# EAGLE board AT42QT1010_Capacitive_Touch_Breakout-Panel-v10 (EAGLE 6.5.0), part 1 of 2
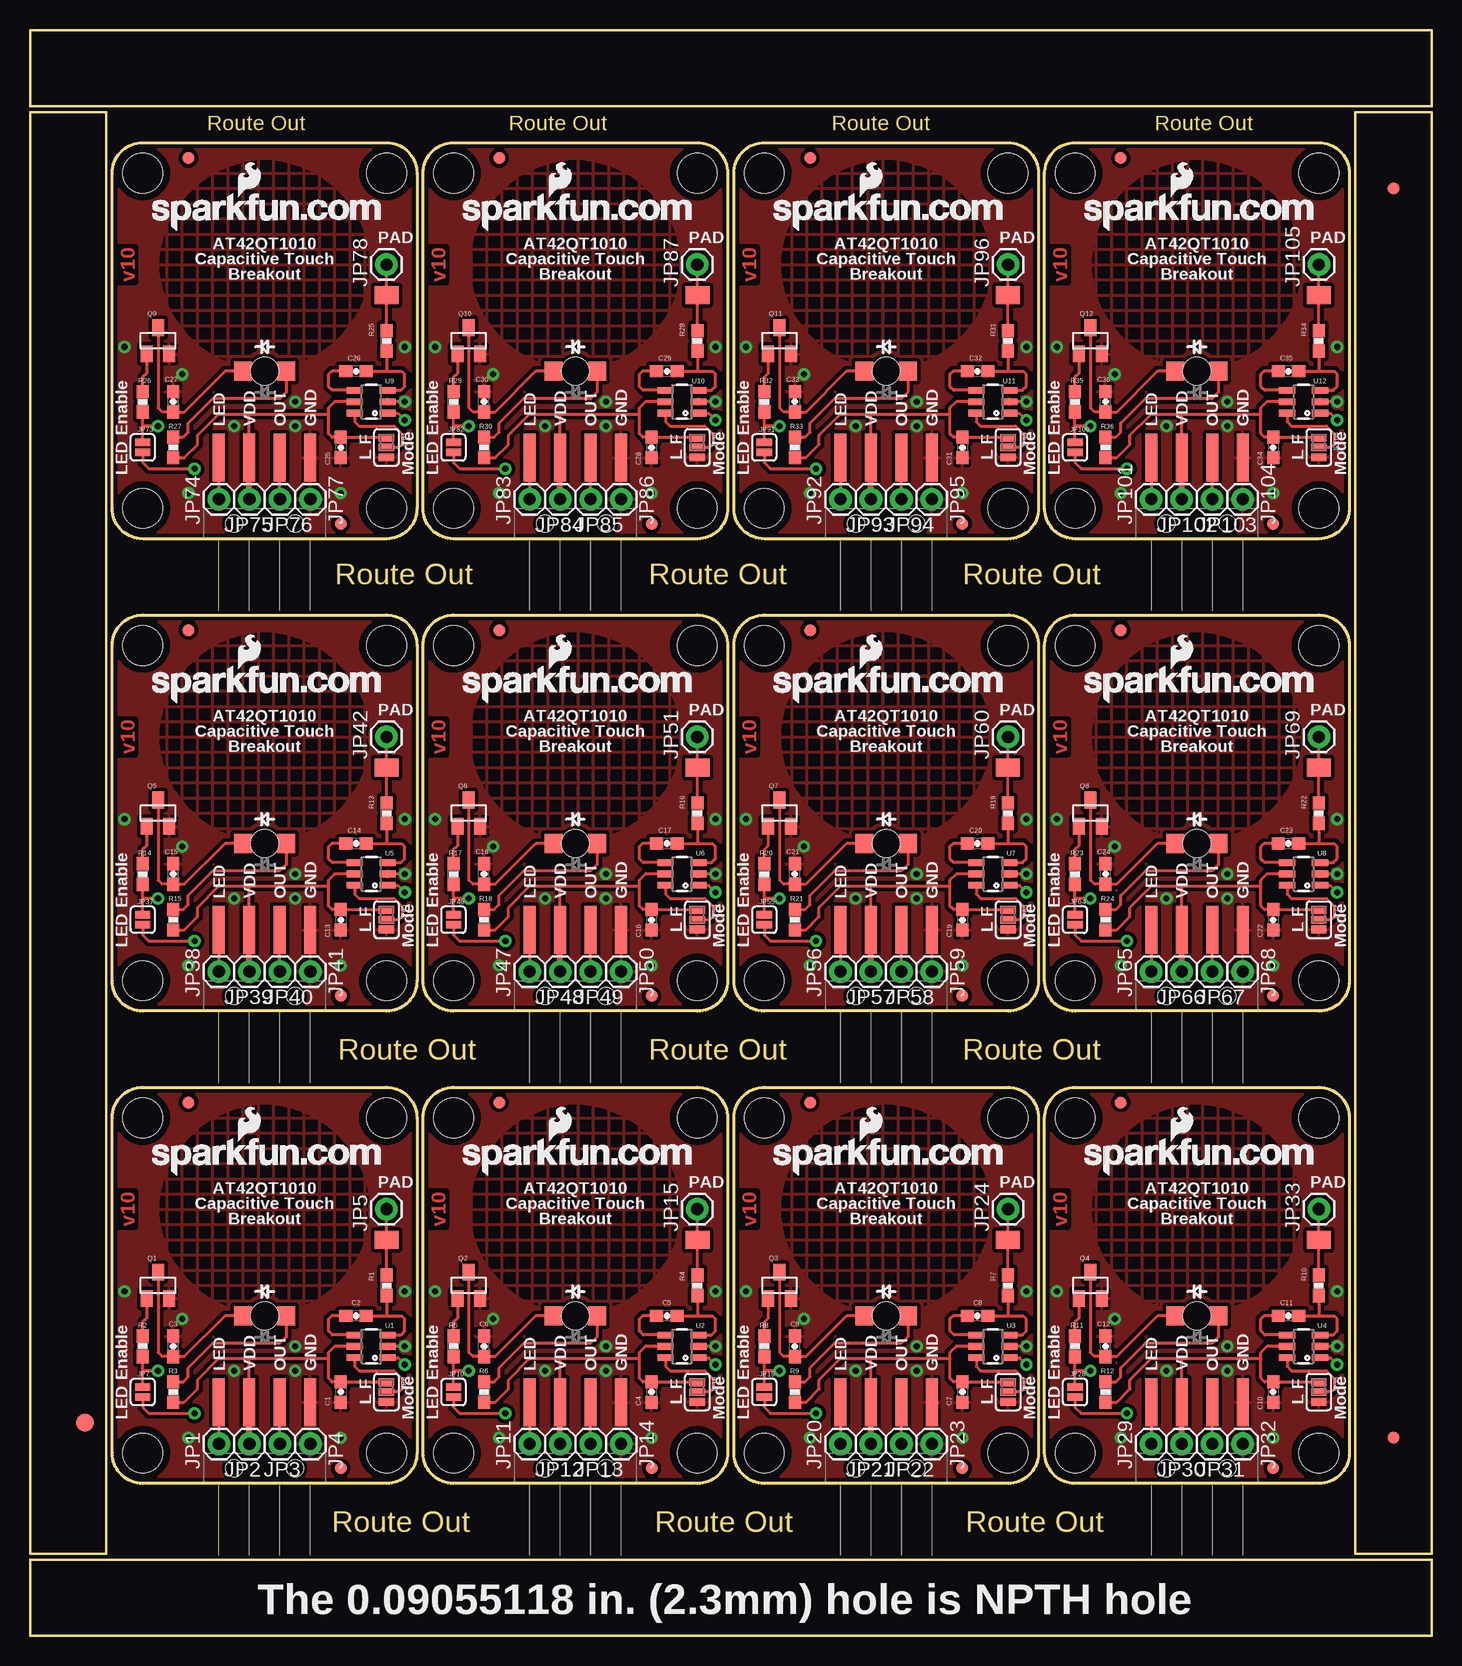
[diagram p0: board, top side]
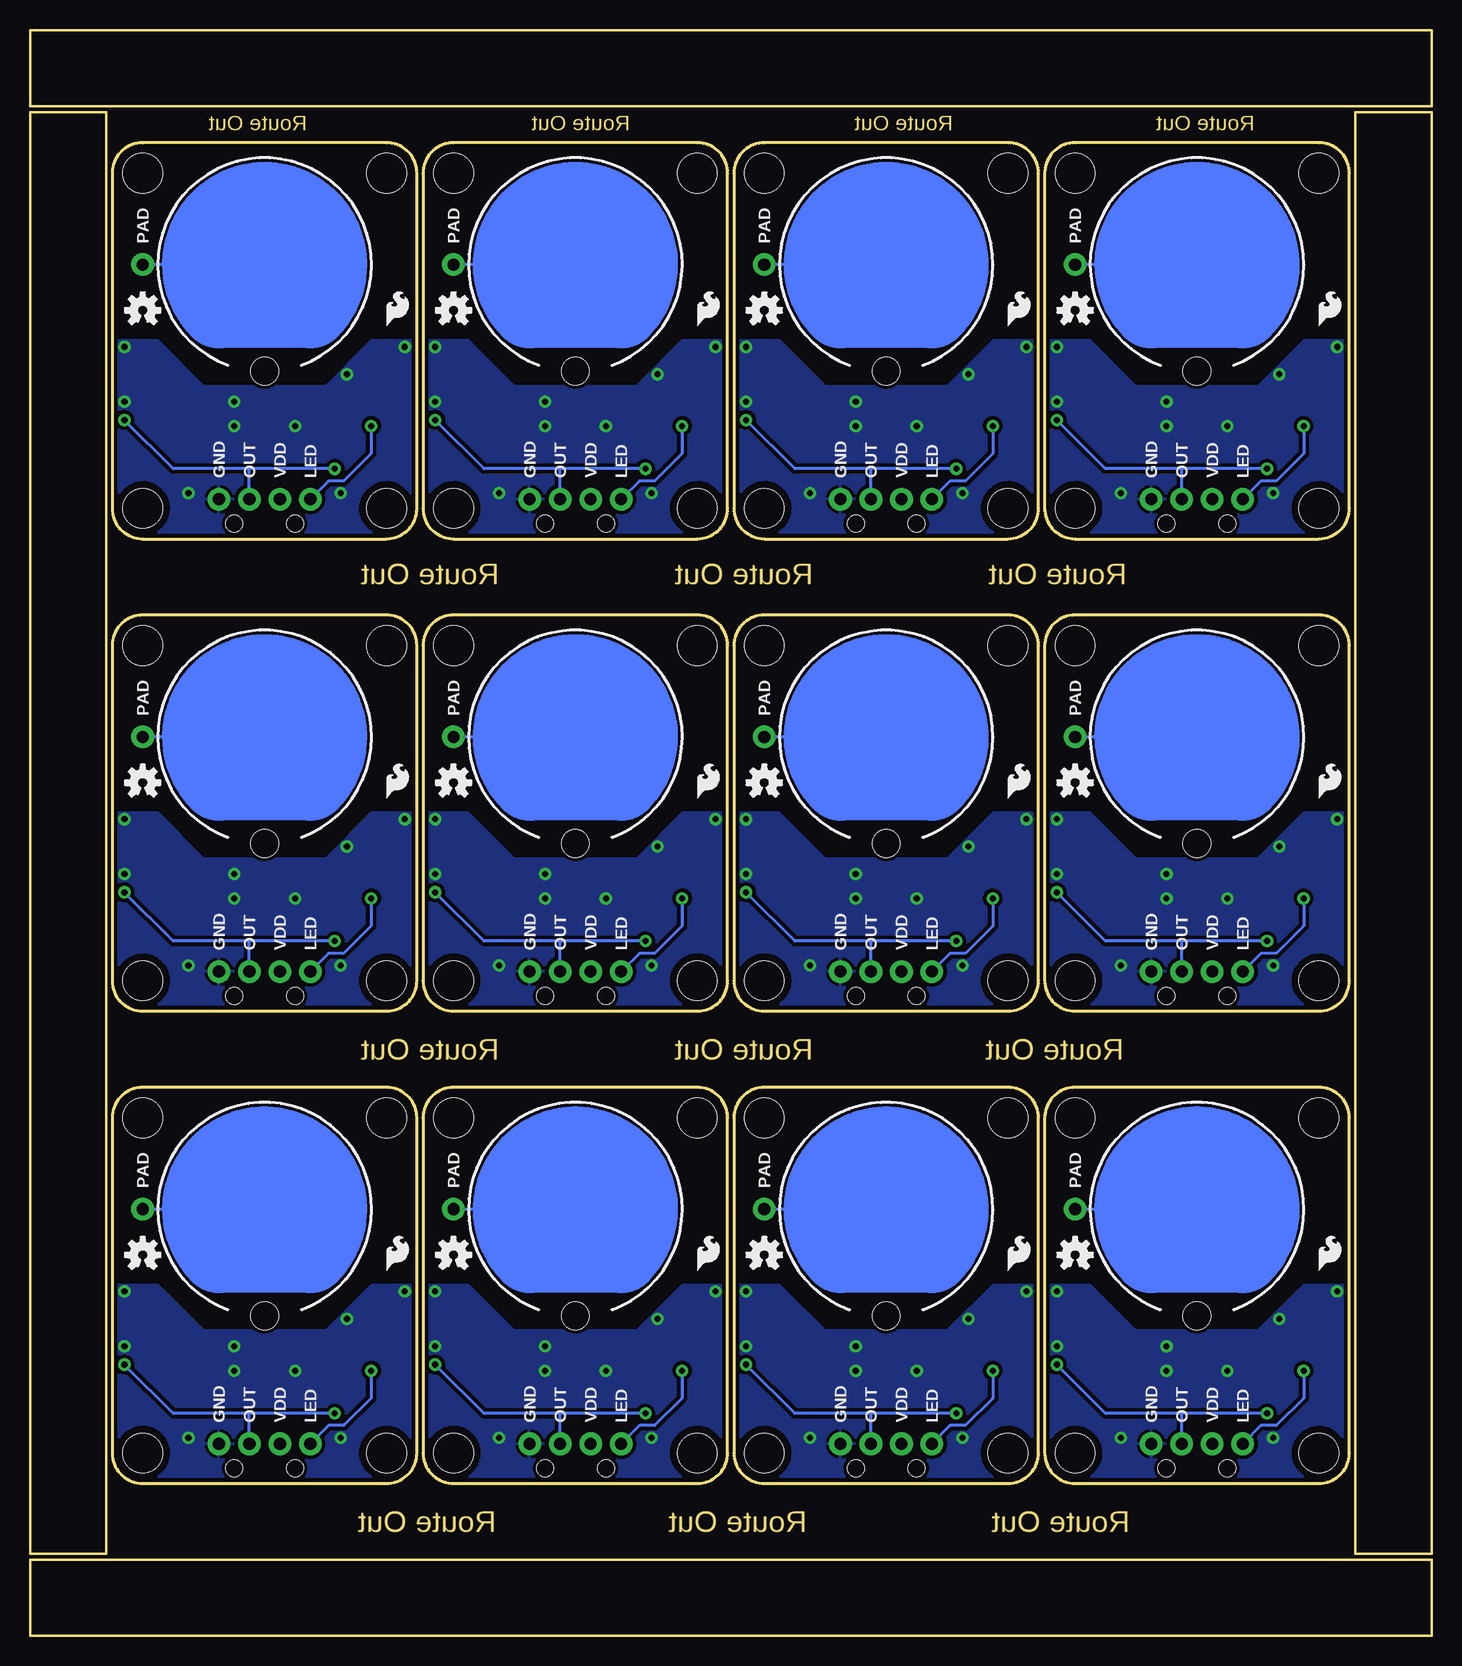
[diagram p1: board, bottom side, seen from below]

Size 116.84 x 133.86 mm. Coordinates in mm from the lower left corner, seen from the top.
Outline: 112 segments
Copper layers (1*16): Top 0.035mm / dielectric 1.5mm / Bottom 0.035mm
Design rules "default": minimum track width 7mil, minimum drill 15mil, track to track 8mil, track to pad 8mil, pad to pad 8mil, via to via 8mil, smd to smd 8mil, copper to edge 8mil, drill to drill 8mil, minimum pad ring 12mil, minimum via ring 10mil, stop-mask expansion 4mil, vias tented up to drill 20mil, thermal gap 10mil
Net classes: 0 default: clearance 0.205 mm
tRestrict: area 6.9,12.7 to 9.4,15.2; area 29.7,12.7 to 32.3,15.2; area 6.9,43.2 to 9.4,45.7; area 29.7,43.2 to 32.3,45.7; area 25.4,25.4 to 26.2,25.9; area 26.9,25.7 to 27.4,25.9; area 27.9,22.4 to 29,25.9; area 29,25.7 to 30.7,26.2; area 9.9,25.9 to 10.2,26.2; area 10.2,22.9 to 10.7,23.1; area 11.7,22.1 to 12.7,22.4; area 10.4,19.1 to 11.2,21.1; 276 more areas

## Footprints (pad centres in the part's own frame; a part is rotated, then mirrored left to right if it is on the bottom)
0603-CAP = smd 1.1 x 1: 1 -0.85,0; 2 0.85,0
FIDUCIAL-1.5X3 = smd 1.5 x 1.5: 1 0,0
FIDUCIAL-1X2 = smd 1 x 1: 1 0,0
1X01 = drill 1.016 pad 1.88: 1 0,0
1X04-SMD_LONG = smd 1 x 4: 1 -3.81,5.5; 2 -1.27,5.5; 3 1.27,5.5; 4 3.81,5.5 | hole 1.4: -2.54,0; 2.54,0
SJ_2S = smd 0.635 x 1.27: 1 -0.412,0; 2 0.412,0
SJ_3_PASTE1&2 = smd 0.635 x 1.27: 1 -0.813,0; 2 0,0; 3 0.813,0
PAD-1.5X4.5 = smd 1.5 x 2: P$1 0,0
LED-1206-BOTTOM = smd 1.5 x 1.6: A -1.8,0; C 1.8,0 | hole 2.3: 0,0
SOT23 = smd 1 x 1.4: 1 -0.95,-1.1; 2 0.95,-1.1; 3 0,1.1
0603-RES = smd 1.1 x 1: 1 -0.85,0; 2 0.85,0
STAND-OFF = hole 3.302: 0,0
SOT23-6 = smd 0.55 x 1.35: 1 -0.95,-1.375; 2 0,-1.375; 3 0.95,-1.375; 4 0.95,1.375; 5 0,1.375; 6 -0.95,1.375

## Placement (x,y rotation side)
C1  0.1uF  [0603-CAP]  25.91,20.32 270 top
C2  10nF  [0603-CAP]  27.18,26.67 180 top
C3  10nF  [0603-CAP]  11.94,24.13 90 top
C4  0.1uF  [0603-CAP]  51.82,20.32 270 top
C5  10nF  [0603-CAP]  53.09,26.67 180 top
C6  10nF  [0603-CAP]  37.85,24.13 90 top
C7  0.1uF  [0603-CAP]  77.72,20.32 270 top
C8  10nF  [0603-CAP]  78.99,26.67 180 top
C9  10nF  [0603-CAP]  63.75,24.13 90 top
C10  0.1uF  [0603-CAP]  103.63,20.32 270 top
C11  10nF  [0603-CAP]  104.9,26.67 180 top
C12  10nF  [0603-CAP]  89.66,24.13 90 top
C13  0.1uF  [0603-CAP]  25.91,59.69 270 top
C14  10nF  [0603-CAP]  27.18,66.04 180 top
C15  10nF  [0603-CAP]  11.94,63.5 90 top
C16  0.1uF  [0603-CAP]  51.82,59.69 270 top
C17  10nF  [0603-CAP]  53.09,66.04 180 top
C18  10nF  [0603-CAP]  37.85,63.5 90 top
C19  0.1uF  [0603-CAP]  77.72,59.69 270 top
C20  10nF  [0603-CAP]  78.99,66.04 180 top
C21  10nF  [0603-CAP]  63.75,63.5 90 top
C22  0.1uF  [0603-CAP]  103.63,59.69 270 top
C23  10nF  [0603-CAP]  104.9,66.04 180 top
C24  10nF  [0603-CAP]  89.66,63.5 90 top
C25  0.1uF  [0603-CAP]  25.91,99.06 270 top
C26  10nF  [0603-CAP]  27.18,105.41 180 top
C27  10nF  [0603-CAP]  11.94,102.87 90 top
C28  0.1uF  [0603-CAP]  51.82,99.06 270 top
C29  10nF  [0603-CAP]  53.09,105.41 180 top
C30  10nF  [0603-CAP]  37.85,102.87 90 top
C31  0.1uF  [0603-CAP]  77.72,99.06 270 top
C32  10nF  [0603-CAP]  78.99,105.41 180 top
C33  10nF  [0603-CAP]  63.75,102.87 90 top
C34  0.1uF  [0603-CAP]  103.63,99.06 270 top
C35  10nF  [0603-CAP]  104.9,105.41 180 top
C36  10nF  [0603-CAP]  89.66,102.87 90 top
E$1  [FIDUCIAL-1.5X3]  4.57,17.78 0 top
E$4  [FIDUCIAL-1X2]  113.67,16.51 0 top
E$5  [FIDUCIAL-1X2]  113.67,120.65 180 top
FID1  FIDUCIAL1X2  [FIDUCIAL-1X2]  13.21,44.45 0 top
FID2  FIDUCIAL1X2  [FIDUCIAL-1X2]  25.91,13.97 0 top
FID3  FIDUCIAL1X2  [FIDUCIAL-1X2]  39.12,44.45 0 top
FID4  FIDUCIAL1X2  [FIDUCIAL-1X2]  51.82,13.97 0 top
FID5  FIDUCIAL1X2  [FIDUCIAL-1X2]  65.02,44.45 0 top
FID6  FIDUCIAL1X2  [FIDUCIAL-1X2]  77.72,13.97 0 top
FID7  FIDUCIAL1X2  [FIDUCIAL-1X2]  90.93,44.45 0 top
FID8  FIDUCIAL1X2  [FIDUCIAL-1X2]  103.63,13.97 0 top
FID9  FIDUCIAL1X2  [FIDUCIAL-1X2]  13.21,83.82 0 top
FID10  FIDUCIAL1X2  [FIDUCIAL-1X2]  25.91,53.34 0 top
FID11  FIDUCIAL1X2  [FIDUCIAL-1X2]  39.12,83.82 0 top
FID12  FIDUCIAL1X2  [FIDUCIAL-1X2]  51.82,53.34 0 top
FID13  FIDUCIAL1X2  [FIDUCIAL-1X2]  65.02,83.82 0 top
FID14  FIDUCIAL1X2  [FIDUCIAL-1X2]  77.72,53.34 0 top
FID15  FIDUCIAL1X2  [FIDUCIAL-1X2]  90.93,83.82 0 top
FID16  FIDUCIAL1X2  [FIDUCIAL-1X2]  103.63,53.34 0 top
FID17  FIDUCIAL1X2  [FIDUCIAL-1X2]  13.21,123.19 0 top
FID18  FIDUCIAL1X2  [FIDUCIAL-1X2]  25.91,92.71 0 top
FID19  FIDUCIAL1X2  [FIDUCIAL-1X2]  39.12,123.19 0 top
FID20  FIDUCIAL1X2  [FIDUCIAL-1X2]  51.82,92.71 0 top
FID21  FIDUCIAL1X2  [FIDUCIAL-1X2]  65.02,123.19 0 top
FID22  FIDUCIAL1X2  [FIDUCIAL-1X2]  77.72,92.71 0 top
FID23  FIDUCIAL1X2  [FIDUCIAL-1X2]  90.93,123.19 0 top
FID24  FIDUCIAL1X2  [FIDUCIAL-1X2]  103.63,92.71 0 top
JP1  M01PTH  [1X01]  15.75,16 0 top
JP2  M01PTH  [1X01]  18.29,16 0 top
JP3  M01PTH  [1X01]  20.83,16 0 top
JP4  M01PTH  [1X01]  23.37,16 0 top
JP5  M01PTH  [1X01]  29.72,35.56 0 top
JP6  SMD  [1X04-SMD_LONG]  19.56,13.97 0 top
JP7  NC  [SJ_2S]  9.4,20.32 90 top
JP8  JUMPER-31-2  [SJ_3_PASTE1&2]  29.72,20.32 270 top
JP9  M01SMD-4.5X1.5  [PAD-1.5X4.5]  29.72,33.02 90 top
JP10  NC  [SJ_2S]  35.31,20.32 90 top
JP11  M01PTH  [1X01]  41.66,16 0 top
JP12  M01PTH  [1X01]  44.2,16 0 top
JP13  M01PTH  [1X01]  46.74,16 0 top
JP14  M01PTH  [1X01]  49.28,16 0 top
JP15  M01PTH  [1X01]  55.63,35.56 0 top
JP16  SMD  [1X04-SMD_LONG]  45.47,13.97 0 top
JP17  M01SMD-4.5X1.5  [PAD-1.5X4.5]  55.63,33.02 90 top
JP18  JUMPER-31-2  [SJ_3_PASTE1&2]  55.63,20.32 270 top
JP19  NC  [SJ_2S]  61.21,20.32 90 top
JP20  M01PTH  [1X01]  67.56,16 0 top
JP21  M01PTH  [1X01]  70.1,16 0 top
JP22  M01PTH  [1X01]  72.64,16 0 top
JP23  M01PTH  [1X01]  75.18,16 0 top
JP24  M01PTH  [1X01]  81.53,35.56 0 top
JP25  SMD  [1X04-SMD_LONG]  71.37,13.97 0 top
JP26  M01SMD-4.5X1.5  [PAD-1.5X4.5]  81.53,33.02 90 top
JP27  JUMPER-31-2  [SJ_3_PASTE1&2]  81.53,20.32 270 top
JP28  NC  [SJ_2S]  87.12,20.32 90 top
JP29  M01PTH  [1X01]  93.47,16 0 top
JP30  M01PTH  [1X01]  96.01,16 0 top
JP31  M01PTH  [1X01]  98.55,16 0 top
JP32  M01PTH  [1X01]  101.09,16 0 top
JP33  M01PTH  [1X01]  107.44,35.56 0 top
JP34  SMD  [1X04-SMD_LONG]  97.28,13.97 0 top
JP35  M01SMD-4.5X1.5  [PAD-1.5X4.5]  107.44,33.02 90 top
JP36  JUMPER-31-2  [SJ_3_PASTE1&2]  107.44,20.32 270 top
JP37  NC  [SJ_2S]  9.4,59.69 90 top
JP38  M01PTH  [1X01]  15.75,55.37 0 top
JP39  M01PTH  [1X01]  18.29,55.37 0 top
JP40  M01PTH  [1X01]  20.83,55.37 0 top
JP41  M01PTH  [1X01]  23.37,55.37 0 top
JP42  M01PTH  [1X01]  29.72,74.93 0 top
JP43  SMD  [1X04-SMD_LONG]  19.56,53.34 0 top
JP44  M01SMD-4.5X1.5  [PAD-1.5X4.5]  29.72,72.39 90 top
JP45  JUMPER-31-2  [SJ_3_PASTE1&2]  29.72,59.69 270 top
JP46  NC  [SJ_2S]  35.31,59.69 90 top
JP47  M01PTH  [1X01]  41.66,55.37 0 top
JP48  M01PTH  [1X01]  44.2,55.37 0 top
JP49  M01PTH  [1X01]  46.74,55.37 0 top
JP50  M01PTH  [1X01]  49.28,55.37 0 top
JP51  M01PTH  [1X01]  55.63,74.93 0 top
JP52  SMD  [1X04-SMD_LONG]  45.47,53.34 0 top
JP53  M01SMD-4.5X1.5  [PAD-1.5X4.5]  55.63,72.39 90 top
JP54  JUMPER-31-2  [SJ_3_PASTE1&2]  55.63,59.69 270 top
JP55  NC  [SJ_2S]  61.21,59.69 90 top
JP56  M01PTH  [1X01]  67.56,55.37 0 top
JP57  M01PTH  [1X01]  70.1,55.37 0 top
JP58  M01PTH  [1X01]  72.64,55.37 0 top
JP59  M01PTH  [1X01]  75.18,55.37 0 top
JP60  M01PTH  [1X01]  81.53,74.93 0 top
JP61  SMD  [1X04-SMD_LONG]  71.37,53.34 0 top
JP62  M01SMD-4.5X1.5  [PAD-1.5X4.5]  81.53,72.39 90 top
JP63  JUMPER-31-2  [SJ_3_PASTE1&2]  81.53,59.69 270 top
JP64  NC  [SJ_2S]  87.12,59.69 90 top
JP65  M01PTH  [1X01]  93.47,55.37 0 top
JP66  M01PTH  [1X01]  96.01,55.37 0 top
JP67  M01PTH  [1X01]  98.55,55.37 0 top
JP68  M01PTH  [1X01]  101.09,55.37 0 top
JP69  M01PTH  [1X01]  107.44,74.93 0 top
JP70  SMD  [1X04-SMD_LONG]  97.28,53.34 0 top
JP71  M01SMD-4.5X1.5  [PAD-1.5X4.5]  107.44,72.39 90 top
JP72  JUMPER-31-2  [SJ_3_PASTE1&2]  107.44,59.69 270 top
JP73  NC  [SJ_2S]  9.4,99.06 90 top
JP74  M01PTH  [1X01]  15.75,94.74 0 top
JP75  M01PTH  [1X01]  18.29,94.74 0 top
JP76  M01PTH  [1X01]  20.83,94.74 0 top
JP77  M01PTH  [1X01]  23.37,94.74 0 top
JP78  M01PTH  [1X01]  29.72,114.3 0 top
JP79  SMD  [1X04-SMD_LONG]  19.56,92.71 0 top
JP80  M01SMD-4.5X1.5  [PAD-1.5X4.5]  29.72,111.76 90 top
JP81  JUMPER-31-2  [SJ_3_PASTE1&2]  29.72,99.06 270 top
JP82  NC  [SJ_2S]  35.31,99.06 90 top
JP83  M01PTH  [1X01]  41.66,94.74 0 top
JP84  M01PTH  [1X01]  44.2,94.74 0 top
JP85  M01PTH  [1X01]  46.74,94.74 0 top
JP86  M01PTH  [1X01]  49.28,94.74 0 top
JP87  M01PTH  [1X01]  55.63,114.3 0 top
JP88  SMD  [1X04-SMD_LONG]  45.47,92.71 0 top
JP89  M01SMD-4.5X1.5  [PAD-1.5X4.5]  55.63,111.76 90 top
JP90  JUMPER-31-2  [SJ_3_PASTE1&2]  55.63,99.06 270 top
JP91  NC  [SJ_2S]  61.21,99.06 90 top
JP92  M01PTH  [1X01]  67.56,94.74 0 top
JP93  M01PTH  [1X01]  70.1,94.74 0 top
JP94  M01PTH  [1X01]  72.64,94.74 0 top
JP95  M01PTH  [1X01]  75.18,94.74 0 top
JP96  M01PTH  [1X01]  81.53,114.3 0 top
JP97  SMD  [1X04-SMD_LONG]  71.37,92.71 0 top
JP98  M01SMD-4.5X1.5  [PAD-1.5X4.5]  81.53,111.76 90 top
JP99  JUMPER-31-2  [SJ_3_PASTE1&2]  81.53,99.06 270 top
JP100  NC  [SJ_2S]  87.12,99.06 90 top
JP101  M01PTH  [1X01]  93.47,94.74 0 top
JP102  M01PTH  [1X01]  96.01,94.74 0 top
JP103  M01PTH  [1X01]  98.55,94.74 0 top
JP104  M01PTH  [1X01]  101.09,94.74 0 top
JP105  M01PTH  [1X01]  107.44,114.3 0 top
JP106  SMD  [1X04-SMD_LONG]  97.28,92.71 0 top
JP107  M01SMD-4.5X1.5  [PAD-1.5X4.5]  107.44,111.76 90 top
JP108  JUMPER-31-2  [SJ_3_PASTE1&2]  107.44,99.06 270 top
LED1  GREEN  [LED-1206-BOTTOM]  19.56,26.67 180 top
LED2  GREEN  [LED-1206-BOTTOM]  45.47,26.67 180 top
LED3  GREEN  [LED-1206-BOTTOM]  71.37,26.67 180 top
LED4  GREEN  [LED-1206-BOTTOM]  97.28,26.67 180 top
LED5  GREEN  [LED-1206-BOTTOM]  19.56,66.04 180 top
LED6  GREEN  [LED-1206-BOTTOM]  45.47,66.04 180 top
LED7  GREEN  [LED-1206-BOTTOM]  71.37,66.04 180 top
LED8  GREEN  [LED-1206-BOTTOM]  97.28,66.04 180 top
LED9  GREEN  [LED-1206-BOTTOM]  19.56,105.41 180 top
LED10  GREEN  [LED-1206-BOTTOM]  45.47,105.41 180 top
LED11  GREEN  [LED-1206-BOTTOM]  71.37,105.41 180 top
LED12  GREEN  [LED-1206-BOTTOM]  97.28,105.41 180 top
LOGO1  LOGO-SFENEW  [SFE-NEW-WEBLOGO]  10.16,38.35 0 top
LOGO2  OSHW-LOGOS  [OSHW-LOGO-S]  29.72,31.75 0 bottom
LOGO3  LOGO-SFESK  [SFE-LOGO-FLAME]  9.4,30.48 0 bottom
LOGO4  OSHW-LOGOS  [OSHW-LOGO-S]  55.63,31.75 0 bottom
LOGO5  LOGO-SFENEW  [SFE-NEW-WEBLOGO]  36.07,38.35 0 top
LOGO6  LOGO-SFESK  [SFE-LOGO-FLAME]  35.31,30.48 0 bottom
LOGO7  OSHW-LOGOS  [OSHW-LOGO-S]  81.53,31.75 0 bottom
LOGO8  LOGO-SFENEW  [SFE-NEW-WEBLOGO]  61.98,38.35 0 top
LOGO9  LOGO-SFESK  [SFE-LOGO-FLAME]  61.21,30.48 0 bottom
LOGO10  OSHW-LOGOS  [OSHW-LOGO-S]  107.44,31.75 0 bottom
LOGO11  LOGO-SFENEW  [SFE-NEW-WEBLOGO]  87.88,38.35 0 top
LOGO12  LOGO-SFESK  [SFE-LOGO-FLAME]  87.12,30.48 0 bottom
LOGO13  OSHW-LOGOS  [OSHW-LOGO-S]  29.72,71.12 0 bottom
LOGO14  LOGO-SFENEW  [SFE-NEW-WEBLOGO]  10.16,77.72 0 top
LOGO15  LOGO-SFESK  [SFE-LOGO-FLAME]  9.4,69.85 0 bottom
LOGO16  OSHW-LOGOS  [OSHW-LOGO-S]  55.63,71.12 0 bottom
LOGO17  LOGO-SFENEW  [SFE-NEW-WEBLOGO]  36.07,77.72 0 top
LOGO18  LOGO-SFESK  [SFE-LOGO-FLAME]  35.31,69.85 0 bottom
LOGO19  OSHW-LOGOS  [OSHW-LOGO-S]  81.53,71.12 0 bottom
LOGO20  LOGO-SFENEW  [SFE-NEW-WEBLOGO]  61.98,77.72 0 top
LOGO21  LOGO-SFESK  [SFE-LOGO-FLAME]  61.21,69.85 0 bottom
LOGO22  OSHW-LOGOS  [OSHW-LOGO-S]  107.44,71.12 0 bottom
LOGO23  LOGO-SFENEW  [SFE-NEW-WEBLOGO]  87.88,77.72 0 top
LOGO24  LOGO-SFESK  [SFE-LOGO-FLAME]  87.12,69.85 0 bottom
LOGO25  OSHW-LOGOS  [OSHW-LOGO-S]  29.72,110.49 0 bottom
LOGO26  LOGO-SFENEW  [SFE-NEW-WEBLOGO]  10.16,117.09 0 top
LOGO27  LOGO-SFESK  [SFE-LOGO-FLAME]  9.4,109.22 0 bottom
LOGO28  OSHW-LOGOS  [OSHW-LOGO-S]  55.63,110.49 0 bottom
LOGO29  LOGO-SFENEW  [SFE-NEW-WEBLOGO]  36.07,117.09 0 top
LOGO30  LOGO-SFESK  [SFE-LOGO-FLAME]  35.31,109.22 0 bottom
LOGO31  OSHW-LOGOS  [OSHW-LOGO-S]  81.53,110.49 0 bottom
LOGO32  LOGO-SFENEW  [SFE-NEW-WEBLOGO]  61.98,117.09 0 top
LOGO33  LOGO-SFESK  [SFE-LOGO-FLAME]  61.21,109.22 0 bottom
LOGO34  OSHW-LOGOS  [OSHW-LOGO-S]  107.44,110.49 0 bottom
LOGO35  LOGO-SFENEW  [SFE-NEW-WEBLOGO]  87.88,117.09 0 top
LOGO36  LOGO-SFESK  [SFE-LOGO-FLAME]  87.12,109.22 0 bottom
Q1  NPN  [SOT23]  10.67,29.21 0 top
Q2  NPN  [SOT23]  36.58,29.21 0 top
Q3  NPN  [SOT23]  62.48,29.21 0 top
Q4  NPN  [SOT23]  88.39,29.21 0 top
Q5  NPN  [SOT23]  10.67,68.58 0 top
Q6  NPN  [SOT23]  36.58,68.58 0 top
Q7  NPN  [SOT23]  62.48,68.58 0 top
Q8  NPN  [SOT23]  88.39,68.58 0 top
Q9  NPN  [SOT23]  10.67,107.95 0 top
Q10  NPN  [SOT23]  36.58,107.95 0 top
Q11  NPN  [SOT23]  62.48,107.95 0 top
Q12  NPN  [SOT23]  88.39,107.95 0 top
R1  10k  [0603-RES]  29.72,29.21 90 top
R2  2.2k  [0603-RES]  9.4,24.13 90 top
R3  200  [0603-RES]  11.94,20.32 270 top
R4  10k  [0603-RES]  55.63,29.21 90 top
R5  2.2k  [0603-RES]  35.31,24.13 90 top
R6  200  [0603-RES]  37.85,20.32 270 top
R7  10k  [0603-RES]  81.53,29.21 90 top
R8  2.2k  [0603-RES]  61.21,24.13 90 top
R9  200  [0603-RES]  63.75,20.32 270 top
R10  10k  [0603-RES]  107.44,29.21 90 top
R11  2.2k  [0603-RES]  87.12,24.13 90 top
R12  200  [0603-RES]  89.66,20.32 270 top
R13  10k  [0603-RES]  29.72,68.58 90 top
R14  2.2k  [0603-RES]  9.4,63.5 90 top
R15  200  [0603-RES]  11.94,59.69 270 top
R16  10k  [0603-RES]  55.63,68.58 90 top
R17  2.2k  [0603-RES]  35.31,63.5 90 top
R18  200  [0603-RES]  37.85,59.69 270 top
R19  10k  [0603-RES]  81.53,68.58 90 top
R20  2.2k  [0603-RES]  61.21,63.5 90 top
R21  200  [0603-RES]  63.75,59.69 270 top
R22  10k  [0603-RES]  107.44,68.58 90 top
R23  2.2k  [0603-RES]  87.12,63.5 90 top
R24  200  [0603-RES]  89.66,59.69 270 top
R25  10k  [0603-RES]  29.72,107.95 90 top
R26  2.2k  [0603-RES]  9.4,102.87 90 top
R27  200  [0603-RES]  11.94,99.06 270 top
R28  10k  [0603-RES]  55.63,107.95 90 top
R29  2.2k  [0603-RES]  35.31,102.87 90 top
R30  200  [0603-RES]  37.85,99.06 270 top
R31  10k  [0603-RES]  81.53,107.95 90 top
R32  2.2k  [0603-RES]  61.21,102.87 90 top
R33  200  [0603-RES]  63.75,99.06 270 top
R34  10k  [0603-RES]  107.44,107.95 90 top
R35  2.2k  [0603-RES]  87.12,102.87 90 top
R36  200  [0603-RES]  89.66,99.06 270 top
STANDOFF1  STAND-OFF  [STAND-OFF]  29.72,15.24 0 top
STANDOFF2  STAND-OFF  [STAND-OFF]  9.4,15.24 0 top
STANDOFF3  STAND-OFF  [STAND-OFF]  29.72,43.18 0 top
STANDOFF4  STAND-OFF  [STAND-OFF]  9.4,43.18 0 top
STANDOFF5  STAND-OFF  [STAND-OFF]  55.63,15.24 0 top
STANDOFF6  STAND-OFF  [STAND-OFF]  35.31,15.24 0 top
STANDOFF7  STAND-OFF  [STAND-OFF]  55.63,43.18 0 top
STANDOFF8  STAND-OFF  [STAND-OFF]  35.31,43.18 0 top
STANDOFF9  STAND-OFF  [STAND-OFF]  81.53,15.24 0 top
STANDOFF10  STAND-OFF  [STAND-OFF]  61.21,15.24 0 top
STANDOFF11  STAND-OFF  [STAND-OFF]  81.53,43.18 0 top
STANDOFF12  STAND-OFF  [STAND-OFF]  61.21,43.18 0 top
STANDOFF13  STAND-OFF  [STAND-OFF]  107.44,15.24 0 top
STANDOFF14  STAND-OFF  [STAND-OFF]  87.12,15.24 0 top
STANDOFF15  STAND-OFF  [STAND-OFF]  107.44,43.18 0 top
STANDOFF16  STAND-OFF  [STAND-OFF]  87.12,43.18 0 top
STANDOFF17  STAND-OFF  [STAND-OFF]  29.72,54.61 0 top
STANDOFF18  STAND-OFF  [STAND-OFF]  9.4,54.61 0 top
STANDOFF19  STAND-OFF  [STAND-OFF]  29.72,82.55 0 top
STANDOFF20  STAND-OFF  [STAND-OFF]  9.4,82.55 0 top
STANDOFF21  STAND-OFF  [STAND-OFF]  55.63,54.61 0 top
STANDOFF22  STAND-OFF  [STAND-OFF]  35.31,54.61 0 top
STANDOFF23  STAND-OFF  [STAND-OFF]  55.63,82.55 0 top
STANDOFF24  STAND-OFF  [STAND-OFF]  35.31,82.55 0 top
STANDOFF25  STAND-OFF  [STAND-OFF]  81.53,54.61 0 top
STANDOFF26  STAND-OFF  [STAND-OFF]  61.21,54.61 0 top
STANDOFF27  STAND-OFF  [STAND-OFF]  81.53,82.55 0 top
STANDOFF28  STAND-OFF  [STAND-OFF]  61.21,82.55 0 top
STANDOFF29  STAND-OFF  [STAND-OFF]  107.44,54.61 0 top
STANDOFF30  STAND-OFF  [STAND-OFF]  87.12,54.61 0 top
STANDOFF31  STAND-OFF  [STAND-OFF]  107.44,82.55 0 top
STANDOFF32  STAND-OFF  [STAND-OFF]  87.12,82.55 0 top
STANDOFF33  STAND-OFF  [STAND-OFF]  29.72,93.98 0 top
STANDOFF34  STAND-OFF  [STAND-OFF]  9.4,93.98 0 top
STANDOFF35  STAND-OFF  [STAND-OFF]  29.72,121.92 0 top
STANDOFF36  STAND-OFF  [STAND-OFF]  9.4,121.92 0 top
STANDOFF37  STAND-OFF  [STAND-OFF]  55.63,93.98 0 top
STANDOFF38  STAND-OFF  [STAND-OFF]  35.31,93.98 0 top
STANDOFF39  STAND-OFF  [STAND-OFF]  55.63,121.92 0 top
STANDOFF40  STAND-OFF  [STAND-OFF]  35.31,121.92 0 top
STANDOFF41  STAND-OFF  [STAND-OFF]  81.53,93.98 0 top
STANDOFF42  STAND-OFF  [STAND-OFF]  61.21,93.98 0 top
STANDOFF43  STAND-OFF  [STAND-OFF]  81.53,121.92 0 top
STANDOFF44  STAND-OFF  [STAND-OFF]  61.21,121.92 0 top
STANDOFF45  STAND-OFF  [STAND-OFF]  107.44,93.98 0 top
STANDOFF46  STAND-OFF  [STAND-OFF]  87.12,93.98 0 top
STANDOFF47  STAND-OFF  [STAND-OFF]  107.44,121.92 0 top
STANDOFF48  STAND-OFF  [STAND-OFF]  87.12,121.92 0 top
U1  AT42QT1010SOT23  [SOT23-6]  28.45,24.13 90 top
U2  AT42QT1010SOT23  [SOT23-6]  54.36,24.13 90 top
U3  AT42QT1010SOT23  [SOT23-6]  80.26,24.13 90 top
U4  AT42QT1010SOT23  [SOT23-6]  106.17,24.13 90 top
U5  AT42QT1010SOT23  [SOT23-6]  28.45,63.5 90 top
U6  AT42QT1010SOT23  [SOT23-6]  54.36,63.5 90 top
U7  AT42QT1010SOT23  [SOT23-6]  80.26,63.5 90 top
U8  AT42QT1010SOT23  [SOT23-6]  106.17,63.5 90 top
U9  AT42QT1010SOT23  [SOT23-6]  28.45,102.87 90 top
U10  AT42QT1010SOT23  [SOT23-6]  54.36,102.87 90 top
U11  AT42QT1010SOT23  [SOT23-6]  80.26,102.87 90 top
U12  AT42QT1010SOT23  [SOT23-6]  106.17,102.87 90 top

## Library data of the parts
C1-C36 = SparkFun-Capacitors
E$1 E$4 E$5 FID1-FID24 LOGO1-LOGO36 = SparkFun-Aesthetics
JP1-JP6 JP9 JP11-JP17 JP20-JP26 JP29-JP35 JP38-JP44 JP47-JP53 JP56-JP62 JP65-JP71 JP74-JP80 JP83-JP89 JP92-JP98 JP101-JP107 = SparkFun-Connectors
JP7 JP8 JP10 JP18 JP19 JP27 JP28 JP36 JP37 JP45 JP46 JP54 JP55 JP63 JP64 JP72 JP73 JP81 JP82 JP90 JP91 JP99 JP100 JP108 = SparkFun-Passives
LED1-LED12 = SparkFun-LED
Q1-Q12 = SparkFun-DiscreteSemi; PROD_ID: TRANS-08049
R1-R36 = SparkFun-Resistors
STANDOFF1-STANDOFF48 = SparkFun-Electromechanical
U1-U12 = SparkFun-DigitalIC

## Nets
GND: C1.2 C3.2 JP4.1 JP6.4 JP8.3 Q1.2 U1.2
GND1: C4.2 C6.2 JP14.1 JP16.4 JP18.3 Q2.2 U2.2
GND2: C7.2 C9.2 JP23.1 JP25.4 JP27.3 Q3.2 U3.2
GND3: C10.2 C12.2 JP32.1 JP34.4 JP36.3 Q4.2 U4.2
GND4: C13.2 C15.2 JP41.1 JP43.4 JP45.3 Q5.2 U5.2
GND5: C16.2 C18.2 JP50.1 JP52.4 JP54.3 Q6.2 U6.2
GND6: C19.2 C21.2 JP59.1 JP61.4 JP63.3 Q7.2 U7.2
GND7: C22.2 C24.2 JP68.1 JP70.4 JP72.3 Q8.2 U8.2
GND8: C25.2 C27.2 JP77.1 JP79.4 JP81.3 Q9.2 U9.2
GND9: C28.2 C30.2 JP86.1 JP88.4 JP90.3 Q10.2 U10.2
GND10: C31.2 C33.2 JP95.1 JP97.4 JP99.3 Q11.2 U11.2
GND11: C34.2 C36.2 JP104.1 JP106.4 JP108.3 Q12.2 U12.2
LED: JP1.1 JP6.1 JP7.2 R2.1
LED1: JP10.2 JP11.1 JP16.1 R5.1
LED2: JP19.2 JP20.1 JP25.1 R8.1
LED3: JP28.2 JP29.1 JP34.1 R11.1
LED4: JP37.2 JP38.1 JP43.1 R14.1
LED5: JP46.2 JP47.1 JP52.1 R17.1
LED6: JP55.2 JP56.1 JP61.1 R20.1
LED7: JP64.2 JP65.1 JP70.1 R23.1
LED8: JP73.2 JP74.1 JP79.1 R26.1
LED9: JP82.2 JP83.1 JP88.1 R29.1
LED10: JP91.2 JP92.1 JP97.1 R32.1
LED11: JP100.2 JP101.1 JP106.1 R35.1
N$1: C5.2 U2.4
N$2: C5.1 R4.1 U2.3
N$3: JP18.2 U2.6
N$4: C2.2 U1.4
N$5: C2.1 R1.1 U1.3
N$6: Q2.1 R5.2
N$7: JP8.2 U1.6
N$8: C6.1 LED2.C Q2.3
N$9: LED2.A R6.1
N$10: Q1.1 R2.2
N$11: C3.1 LED1.C Q1.3
N$12: LED1.A R3.1
N$13: C8.2 U3.4
N$14: C8.1 R7.1 U3.3
N$15: JP27.2 U3.6
N$16: Q3.1 R8.2
N$17: C9.1 LED3.C Q3.3
N$18: LED3.A R9.1
N$19: C11.2 U4.4
N$20: C11.1 R10.1 U4.3
N$21: JP36.2 U4.6
N$22: Q4.1 R11.2
N$23: C12.1 LED4.C Q4.3
N$24: LED4.A R12.1
N$25: C14.2 U5.4
N$26: C14.1 R13.1 U5.3
N$27: JP45.2 U5.6
N$28: Q5.1 R14.2
N$29: C15.1 LED5.C Q5.3
N$30: LED5.A R15.1
N$31: C17.2 U6.4
N$32: C17.1 R16.1 U6.3
N$33: JP54.2 U6.6
N$34: Q6.1 R17.2
N$35: C18.1 LED6.C Q6.3
N$36: LED6.A R18.1
N$37: C20.2 U7.4
N$38: C20.1 R19.1 U7.3
N$39: JP63.2 U7.6
N$40: Q7.1 R20.2
N$41: C21.1 LED7.C Q7.3
N$42: LED7.A R21.1
N$43: C23.2 U8.4
N$44: C23.1 R22.1 U8.3
N$45: JP72.2 U8.6
N$46: Q8.1 R23.2
N$47: C24.1 LED8.C Q8.3
N$48: LED8.A R24.1
N$49: C26.2 U9.4
N$50: C26.1 R25.1 U9.3
N$51: JP81.2 U9.6
N$52: Q9.1 R26.2
N$53: C27.1 LED9.C Q9.3
N$54: LED9.A R27.1
N$55: C29.2 U10.4
N$56: C29.1 R28.1 U10.3
N$57: JP90.2 U10.6
N$58: Q10.1 R29.2
N$59: C30.1 LED10.C Q10.3
N$60: LED10.A R30.1
N$61: C32.2 U11.4
N$62: C32.1 R31.1 U11.3
N$63: JP99.2 U11.6
N$64: Q11.1 R32.2
N$65: C33.1 LED11.C Q11.3
N$66: LED11.A R33.1
N$67: C35.2 U12.4
N$68: C35.1 R34.1 U12.3
N$69: JP108.2 U12.6
N$70: Q12.1 R35.2
N$71: C36.1 LED12.C Q12.3
N$72: LED12.A R36.1
OUT: JP3.1 JP6.3 JP7.1 U1.1
OUT1: JP10.1 JP13.1 JP16.3 U2.1
OUT2: JP19.1 JP22.1 JP25.3 U3.1
OUT3: JP28.1 JP31.1 JP34.3 U4.1
OUT4: JP37.1 JP40.1 JP43.3 U5.1
OUT5: JP46.1 JP49.1 JP52.3 U6.1
OUT6: JP55.1 JP58.1 JP61.3 U7.1
OUT7: JP64.1 JP67.1 JP70.3 U8.1
OUT8: JP73.1 JP76.1 JP79.3 U9.1
OUT9: JP82.1 JP85.1 JP88.3 U10.1
OUT10: JP91.1 JP94.1 JP97.3 U11.1
OUT11: JP100.1 JP103.1 JP106.3 U12.1
PAD: JP5.1 JP9.P$1 R1.2
PAD1: JP15.1 JP17.P$1 R4.2
PAD2: JP24.1 JP26.P$1 R7.2
PAD3: JP33.1 JP35.P$1 R10.2
PAD4: JP42.1 JP44.P$1 R13.2
PAD5: JP51.1 JP53.P$1 R16.2
PAD6: JP60.1 JP62.P$1 R19.2
PAD7: JP69.1 JP71.P$1 R22.2
PAD8: JP78.1 JP80.P$1 R25.2
PAD9: JP87.1 JP89.P$1 R28.2
PAD10: JP96.1 JP98.P$1 R31.2
PAD11: JP105.1 JP107.P$1 R34.2
VCC: C1.1 JP2.1 JP6.2 JP8.1 R3.2 U1.5
VCC1: C4.1 JP12.1 JP16.2 JP18.1 R6.2 U2.5
VCC2: C7.1 JP21.1 JP25.2 JP27.1 R9.2 U3.5
VCC3: C10.1 JP30.1 JP34.2 JP36.1 R12.2 U4.5
VCC4: C13.1 JP39.1 JP43.2 JP45.1 R15.2 U5.5
VCC5: C16.1 JP48.1 JP52.2 JP54.1 R18.2 U6.5
VCC6: C19.1 JP57.1 JP61.2 JP63.1 R21.2 U7.5
VCC7: C22.1 JP66.1 JP70.2 JP72.1 R24.2 U8.5
VCC8: C25.1 JP75.1 JP79.2 JP81.1 R27.2 U9.5
VCC9: C28.1 JP84.1 JP88.2 JP90.1 R30.2 U10.5
VCC10: C31.1 JP93.1 JP97.2 JP99.1 R33.2 U11.5
VCC11: C34.1 JP102.1 JP106.2 JP108.1 R36.2 U12.5

## Tracks (layer width: path | path; a pad name or v marks a point on that pad's centre or on a via)
GND  (via drill 0.51)
  Top 0.254: v31.24,24.13 U1.2
  other vias: 13.21,16.51 25.91,16.51 12.7,26.42 17.02,22.1 22.1,22.1 7.87,28.7 31.24,28.7 22.1,24.13
  pour Bottom (isolate 0.305): 6.86,12.7 6.86,29.21 10.67,29.21 14.48,25.4 24.64,25.4 28.45,29.21 32.26,29.21 32.26,12.7
  pour Top (isolate 0.305): 6.86,12.7 32.26,12.7 32.26,35.56 28.45,35.56 arc-90 19.56,26.67 arc-90 10.67,35.56 6.86,35.56
  pour Top (isolate 0.305, hatched): 10.67,35.56 arc-90 19.56,44.45 arc-90 28.45,35.56 arc-90 19.56,26.67 arc-90
  pour Top (isolate 0.305): 10.67,35.56 arc-90 19.56,44.45 arc-90 28.45,35.56 32.26,35.56 32.26,45.72 6.86,45.72 6.86,35.56
GND1  (via drill 0.51)
  Top 0.254: v57.15,24.13 U2.2
  other vias: 39.12,16.51 51.82,16.51 38.61,26.42 42.93,22.1 48.01,22.1 33.78,28.7 57.15,28.7 48.01,24.13
  pour Bottom (isolate 0.305): 32.77,12.7 32.77,29.21 36.58,29.21 40.39,25.4 50.55,25.4 54.36,29.21 58.17,29.21 58.17,12.7
  pour Top (isolate 0.305): 32.77,12.7 58.17,12.7 58.17,35.56 54.36,35.56 arc-90 45.47,26.67 arc-90 36.58,35.56 32.77,35.56
  pour Top (isolate 0.305, hatched): 36.58,35.56 arc-90 45.47,44.45 arc-90 54.36,35.56 arc-90 45.47,26.67 arc-90
  pour Top (isolate 0.305): 36.58,35.56 arc-90 45.47,44.45 arc-90 54.36,35.56 58.17,35.56 58.17,45.72 32.77,45.72 32.77,35.56
GND2  (via drill 0.51)
  Top 0.254: v83.06,24.13 U3.2
  other vias: 65.02,16.51 77.72,16.51 64.52,26.42 68.83,22.1 73.91,22.1 59.69,28.7 83.06,28.7 73.91,24.13
  pour Bottom (isolate 0.305): 58.67,12.7 58.67,29.21 62.48,29.21 66.29,25.4 76.45,25.4 80.26,29.21 84.07,29.21 84.07,12.7
  pour Top (isolate 0.305): 58.67,12.7 84.07,12.7 84.07,35.56 80.26,35.56 arc-90 71.37,26.67 arc-90 62.48,35.56 58.67,35.56
  pour Top (isolate 0.305, hatched): 62.48,35.56 arc-90 71.37,44.45 arc-90 80.26,35.56 arc-90 71.37,26.67 arc-90
  pour Top (isolate 0.305): 62.48,35.56 arc-90 71.37,44.45 arc-90 80.26,35.56 84.07,35.56 84.07,45.72 58.67,45.72 58.67,35.56
GND3  (via drill 0.51)
  Top 0.254: v108.97,24.13 U4.2
  other vias: 90.93,16.51 103.63,16.51 90.42,26.42 94.74,22.1 99.82,22.1 85.6,28.7 108.97,28.7 99.82,24.13
  pour Bottom (isolate 0.305): 84.58,12.7 84.58,29.21 88.39,29.21 92.2,25.4 102.36,25.4 106.17,29.21 109.98,29.21 109.98,12.7
  pour Top (isolate 0.305): 84.58,12.7 109.98,12.7 109.98,35.56 106.17,35.56 arc-90 97.28,26.67 arc-90 88.39,35.56 84.58,35.56
  pour Top (isolate 0.305, hatched): 88.39,35.56 arc-90 97.28,44.45 arc-90 106.17,35.56 arc-90 97.28,26.67 arc-90
  pour Top (isolate 0.305): 88.39,35.56 arc-90 97.28,44.45 arc-90 106.17,35.56 109.98,35.56 109.98,45.72 84.58,45.72 84.58,35.56
GND4  (via drill 0.51)
  Top 0.254: v31.24,63.5 U5.2
  other vias: 13.21,55.88 25.91,55.88 12.7,65.79 17.02,61.47 22.1,61.47 7.87,68.07 31.24,68.07 22.1,63.5
  pour Bottom (isolate 0.305): 6.86,52.07 6.86,68.58 10.67,68.58 14.48,64.77 24.64,64.77 28.45,68.58 32.26,68.58 32.26,52.07
  pour Top (isolate 0.305): 6.86,52.07 32.26,52.07 32.26,74.93 28.45,74.93 arc-90 19.56,66.04 arc-90 10.67,74.93 6.86,74.93
  pour Top (isolate 0.305, hatched): 10.67,74.93 arc-90 19.56,83.82 arc-90 28.45,74.93 arc-90 19.56,66.04 arc-90
  pour Top (isolate 0.305): 10.67,74.93 arc-90 19.56,83.82 arc-90 28.45,74.93 32.26,74.93 32.26,85.09 6.86,85.09 6.86,74.93
GND5  (via drill 0.51)
  Top 0.254: v57.15,63.5 U6.2
  other vias: 39.12,55.88 51.82,55.88 38.61,65.79 42.93,61.47 48.01,61.47 33.78,68.07 57.15,68.07 48.01,63.5
  pour Bottom (isolate 0.305): 32.77,52.07 32.77,68.58 36.58,68.58 40.39,64.77 50.55,64.77 54.36,68.58 58.17,68.58 58.17,52.07
  pour Top (isolate 0.305): 32.77,52.07 58.17,52.07 58.17,74.93 54.36,74.93 arc-90 45.47,66.04 arc-90 36.58,74.93 32.77,74.93
  pour Top (isolate 0.305, hatched): 36.58,74.93 arc-90 45.47,83.82 arc-90 54.36,74.93 arc-90 45.47,66.04 arc-90
  pour Top (isolate 0.305): 36.58,74.93 arc-90 45.47,83.82 arc-90 54.36,74.93 58.17,74.93 58.17,85.09 32.77,85.09 32.77,74.93
GND6  (via drill 0.51)
  Top 0.254: v83.06,63.5 U7.2
  other vias: 65.02,55.88 77.72,55.88 64.52,65.79 68.83,61.47 73.91,61.47 59.69,68.07 83.06,68.07 73.91,63.5
  pour Bottom (isolate 0.305): 58.67,52.07 58.67,68.58 62.48,68.58 66.29,64.77 76.45,64.77 80.26,68.58 84.07,68.58 84.07,52.07
  pour Top (isolate 0.305): 58.67,52.07 84.07,52.07 84.07,74.93 80.26,74.93 arc-90 71.37,66.04 arc-90 62.48,74.93 58.67,74.93
  pour Top (isolate 0.305, hatched): 62.48,74.93 arc-90 71.37,83.82 arc-90 80.26,74.93 arc-90 71.37,66.04 arc-90
  pour Top (isolate 0.305): 62.48,74.93 arc-90 71.37,83.82 arc-90 80.26,74.93 84.07,74.93 84.07,85.09 58.67,85.09 58.67,74.93
GND7  (via drill 0.51)
  Top 0.254: v108.97,63.5 U8.2
  other vias: 90.93,55.88 103.63,55.88 90.42,65.79 94.74,61.47 99.82,61.47 85.6,68.07 108.97,68.07 99.82,63.5
  pour Bottom (isolate 0.305): 84.58,52.07 84.58,68.58 88.39,68.58 92.2,64.77 102.36,64.77 106.17,68.58 109.98,68.58 109.98,52.07
  pour Top (isolate 0.305): 84.58,52.07 109.98,52.07 109.98,74.93 106.17,74.93 arc-90 97.28,66.04 arc-90 88.39,74.93 84.58,74.93
  pour Top (isolate 0.305, hatched): 88.39,74.93 arc-90 97.28,83.82 arc-90 106.17,74.93 arc-90 97.28,66.04 arc-90
  pour Top (isolate 0.305): 88.39,74.93 arc-90 97.28,83.82 arc-90 106.17,74.93 109.98,74.93 109.98,85.09 84.58,85.09 84.58,74.93
GND8  (via drill 0.51)
  Top 0.254: v31.24,102.87 U9.2
  other vias: 13.21,95.25 25.91,95.25 12.7,105.16 17.02,100.84 22.1,100.84 7.87,107.44 31.24,107.44 22.1,102.87
  pour Bottom (isolate 0.305): 6.86,91.44 6.86,107.95 10.67,107.95 14.48,104.14 24.64,104.14 28.45,107.95 32.26,107.95 32.26,91.44
  pour Top (isolate 0.305): 6.86,91.44 32.26,91.44 32.26,114.3 28.45,114.3 arc-90 19.56,105.41 arc-90 10.67,114.3 6.86,114.3
  pour Top (isolate 0.305, hatched): 10.67,114.3 arc-90 19.56,123.19 arc-90 28.45,114.3 arc-90 19.56,105.41 arc-90
  pour Top (isolate 0.305): 10.67,114.3 arc-90 19.56,123.19 arc-90 28.45,114.3 32.26,114.3 32.26,124.46 6.86,124.46 6.86,114.3
GND9  (via drill 0.51)
  Top 0.254: v57.15,102.87 U10.2
  other vias: 39.12,95.25 51.82,95.25 38.61,105.16 42.93,100.84 48.01,100.84 33.78,107.44 57.15,107.44 48.01,102.87
  pour Bottom (isolate 0.305): 32.77,91.44 32.77,107.95 36.58,107.95 40.39,104.14 50.55,104.14 54.36,107.95 58.17,107.95 58.17,91.44
  pour Top (isolate 0.305): 32.77,91.44 58.17,91.44 58.17,114.3 54.36,114.3 arc-90 45.47,105.41 arc-90 36.58,114.3 32.77,114.3
  pour Top (isolate 0.305, hatched): 36.58,114.3 arc-90 45.47,123.19 arc-90 54.36,114.3 arc-90 45.47,105.41 arc-90
  pour Top (isolate 0.305): 36.58,114.3 arc-90 45.47,123.19 arc-90 54.36,114.3 58.17,114.3 58.17,124.46 32.77,124.46 32.77,114.3
GND10  (via drill 0.51)
  Top 0.254: v83.06,102.87 U11.2
  other vias: 65.02,95.25 77.72,95.25 64.52,105.16 68.83,100.84 73.91,100.84 59.69,107.44 83.06,107.44 73.91,102.87
  pour Bottom (isolate 0.305): 58.67,91.44 58.67,107.95 62.48,107.95 66.29,104.14 76.45,104.14 80.26,107.95 84.07,107.95 84.07,91.44
  pour Top (isolate 0.305): 58.67,91.44 84.07,91.44 84.07,114.3 80.26,114.3 arc-90 71.37,105.41 arc-90 62.48,114.3 58.67,114.3
  pour Top (isolate 0.305, hatched): 62.48,114.3 arc-90 71.37,123.19 arc-90 80.26,114.3 arc-90 71.37,105.41 arc-90
  pour Top (isolate 0.305): 62.48,114.3 arc-90 71.37,123.19 arc-90 80.26,114.3 84.07,114.3 84.07,124.46 58.67,124.46 58.67,114.3
GND11  (via drill 0.51)
  Top 0.254: v108.97,102.87 U12.2
  other vias: 90.93,95.25 103.63,95.25 90.42,105.16 94.74,100.84 99.82,100.84 85.6,107.44 108.97,107.44 99.82,102.87
  pour Bottom (isolate 0.305): 84.58,91.44 84.58,107.95 88.39,107.95 92.2,104.14 102.36,104.14 106.17,107.95 109.98,107.95 109.98,91.44
  pour Top (isolate 0.305): 84.58,91.44 109.98,91.44 109.98,114.3 106.17,114.3 arc-90 97.28,105.41 arc-90 88.39,114.3 84.58,114.3
  pour Top (isolate 0.305, hatched): 88.39,114.3 arc-90 97.28,123.19 arc-90 106.17,114.3 arc-90 97.28,105.41 arc-90
  pour Top (isolate 0.305): 88.39,114.3 arc-90 97.28,123.19 arc-90 106.17,114.3 109.98,114.3 109.98,124.46 84.58,124.46 84.58,114.3
LED  (via drill 0.51)
  Top 0.254: JP7.2 9.4,22.1 | 9.4,22.1 R2.1 | v10.67,22.1 9.4,22.1 | JP6.1 JP1.1
  Bottom 0.254: v10.67,22.1 10.67,19.81 12.95,17.53 14.22,17.53 JP1.1
LED1  (via drill 0.51)
  Top 0.254: JP10.2 35.31,22.1 | 35.31,22.1 R5.1 | v36.58,22.1 35.31,22.1 | JP16.1 JP11.1
  Bottom 0.254: v36.58,22.1 36.58,19.81 38.86,17.53 40.13,17.53 JP11.1
LED2  (via drill 0.51)
  Top 0.254: JP19.2 61.21,22.1 | 61.21,22.1 R8.1 | v62.48,22.1 61.21,22.1 | JP25.1 JP20.1
  Bottom 0.254: v62.48,22.1 62.48,19.81 64.77,17.53 66.04,17.53 JP20.1
LED3  (via drill 0.51)
  Top 0.254: JP28.2 87.12,22.1 | 87.12,22.1 R11.1 | v88.39,22.1 87.12,22.1 | JP34.1 JP29.1
  Bottom 0.254: v88.39,22.1 88.39,19.81 90.68,17.53 91.95,17.53 JP29.1
LED4  (via drill 0.51)
  Top 0.254: JP37.2 9.4,61.47 | 9.4,61.47 R14.1 | v10.67,61.47 9.4,61.47 | JP43.1 JP38.1
  Bottom 0.254: v10.67,61.47 10.67,59.18 12.95,56.9 14.22,56.9 JP38.1
LED5  (via drill 0.51)
  Top 0.254: JP46.2 35.31,61.47 | 35.31,61.47 R17.1 | v36.58,61.47 35.31,61.47 | JP52.1 JP47.1
  Bottom 0.254: v36.58,61.47 36.58,59.18 38.86,56.9 40.13,56.9 JP47.1
LED6  (via drill 0.51)
  Top 0.254: JP55.2 61.21,61.47 | 61.21,61.47 R20.1 | v62.48,61.47 61.21,61.47 | JP61.1 JP56.1
  Bottom 0.254: v62.48,61.47 62.48,59.18 64.77,56.9 66.04,56.9 JP56.1
LED7  (via drill 0.51)
  Top 0.254: JP64.2 87.12,61.47 | 87.12,61.47 R23.1 | v88.39,61.47 87.12,61.47 | JP70.1 JP65.1
  Bottom 0.254: v88.39,61.47 88.39,59.18 90.68,56.9 91.95,56.9 JP65.1
LED8  (via drill 0.51)
  Top 0.254: JP73.2 9.4,100.84 | 9.4,100.84 R26.1 | v10.67,100.84 9.4,100.84 | JP79.1 JP74.1
  Bottom 0.254: v10.67,100.84 10.67,98.55 12.95,96.27 14.22,96.27 JP74.1
LED9  (via drill 0.51)
  Top 0.254: JP82.2 35.31,100.84 | 35.31,100.84 R29.1 | v36.58,100.84 35.31,100.84 | JP88.1 JP83.1
  Bottom 0.254: v36.58,100.84 36.58,98.55 38.86,96.27 40.13,96.27 JP83.1
LED10  (via drill 0.51)
  Top 0.254: JP91.2 61.21,100.84 | 61.21,100.84 R32.1 | v62.48,100.84 61.21,100.84 | JP97.1 JP92.1
  Bottom 0.254: v62.48,100.84 62.48,98.55 64.77,96.27 66.04,96.27 JP92.1
LED11  (via drill 0.51)
  Top 0.254: JP100.2 87.12,100.84 | 87.12,100.84 R35.1 | v88.39,100.84 87.12,100.84 | JP106.1 JP101.1
  Bottom 0.254: v88.39,100.84 88.39,98.55 90.68,96.27 91.95,96.27 JP101.1
N$1
  Top 0.254: U2.4 51.12,25.08 50.8,25.4 50.8,26.42 51.05,26.67 C5.2
N$2
  Top 0.254: C5.1 55.63,26.67 | 55.63,26.67 56.9,26.67 57.15,26.42 57.15,25.4 56.83,25.08 U2.3 | R4.1 55.63,26.67
N$3
  Top 0.254: U2.6 52.98,22.46 53.34,22.1 56.26,22.1 56.92,21.44 56.92,20.6 56.64,20.32 JP18.2
N$4
  Top 0.254: U1.4 25.21,25.08 24.89,25.4 24.89,26.42 25.15,26.67 C2.2
N$5
  Top 0.254: C2.1 29.72,26.67 | 29.72,26.67 30.99,26.67 31.24,26.42 31.24,25.4 30.92,25.08 U1.3 | R1.1 29.72,26.67
N$6
  Top 0.254: R5.2 35.31,26.16 35.63,26.48 Q2.1
N$7
  Top 0.254: U1.6 27.07,22.46 27.43,22.1 30.35,22.1 31.01,21.44 31.01,20.6 30.73,20.32 JP8.2
N$8
  Top 0.254: Q2.3 36.58,23.62 36.92,23.28 C6.1 38.77,23.28 42.16,26.67 LED2.C
N$9
  Top 0.254: R6.1 38.7,21.17 39.12,21.59 39.12,22.35 41.15,24.38 46.74,24.38 47.27,24.91 LED2.A
N$10
  Top 0.254: R2.2 9.4,26.16 9.72,26.48 Q1.1
N$11
  Top 0.254: Q1.3 10.67,23.62 11.01,23.28 C3.1 12.87,23.28 16.26,26.67 LED1.C
N$12
  Top 0.254: R3.1 12.79,21.17 13.21,21.59 13.21,22.35 15.24,24.38 20.83,24.38 21.36,24.91 LED1.A
N$13
  Top 0.254: U3.4 77.03,25.08 76.71,25.4 76.71,26.42 76.96,26.67 C8.2
N$14
  Top 0.254: C8.1 81.53,26.67 | 81.53,26.67 82.8,26.67 83.06,26.42 83.06,25.4 82.74,25.08 U3.3 | R7.1 81.53,26.67
N$15
  Top 0.254: U3.6 78.89,22.46 79.25,22.1 82.17,22.1 82.83,21.44 82.83,20.6 82.55,20.32 JP27.2
N$16
  Top 0.254: R8.2 61.21,26.16 61.53,26.48 Q3.1
N$17
  Top 0.254: Q3.3 62.48,23.62 62.83,23.28 C9.1 64.68,23.28 68.07,26.67 LED3.C
N$18
  Top 0.254: R9.1 64.6,21.17 65.02,21.59 65.02,22.35 67.06,24.38 72.64,24.38 73.17,24.91 LED3.A
N$19
  Top 0.254: U4.4 102.94,25.08 102.62,25.4 102.62,26.42 102.87,26.67 C11.2
N$20
  Top 0.254: C11.1 107.44,26.67 | 107.44,26.67 108.71,26.67 108.97,26.42 108.97,25.4 108.65,25.08 U4.3 | R10.1 107.44,26.67
N$21
  Top 0.254: U4.6 104.8,22.46 105.16,22.1 108.08,22.1 108.74,21.44 108.74,20.6 108.46,20.32 JP36.2
N$22
  Top 0.254: R11.2 87.12,26.16 87.44,26.48 Q4.1
N$23
  Top 0.254: Q4.3 88.39,23.62 88.73,23.28 C12.1 90.59,23.28 93.98,26.67 LED4.C
N$24
  Top 0.254: R12.1 90.51,21.17 90.93,21.59 90.93,22.35 92.96,24.38 98.55,24.38 99.08,24.91 LED4.A
N$25
  Top 0.254: U5.4 25.21,64.45 24.89,64.77 24.89,65.79 25.15,66.04 C14.2
N$26
  Top 0.254: C14.1 29.72,66.04 | 29.72,66.04 30.99,66.04 31.24,65.79 31.24,64.77 30.92,64.45 U5.3 | R13.1 29.72,66.04
N$27
  Top 0.254: U5.6 27.07,61.83 27.43,61.47 30.35,61.47 31.01,60.81 31.01,59.97 30.73,59.69 JP45.2
N$28
  Top 0.254: R14.2 9.4,65.53 9.72,65.85 Q5.1
N$29
  Top 0.254: Q5.3 10.67,62.99 11.01,62.65 C15.1 12.87,62.65 16.26,66.04 LED5.C
N$30
  Top 0.254: R15.1 12.79,60.54 13.21,60.96 13.21,61.72 15.24,63.75 20.83,63.75 21.36,64.28 LED5.A
N$31
  Top 0.254: U6.4 51.12,64.45 50.8,64.77 50.8,65.79 51.05,66.04 C17.2
N$32
  Top 0.254: C17.1 55.63,66.04 | 55.63,66.04 56.9,66.04 57.15,65.79 57.15,64.77 56.83,64.45 U6.3 | R16.1 55.63,66.04
N$33
  Top 0.254: U6.6 52.98,61.83 53.34,61.47 56.26,61.47 56.92,60.81 56.92,59.97 56.64,59.69 JP54.2
N$34
  Top 0.254: R17.2 35.31,65.53 35.63,65.85 Q6.1
N$35
  Top 0.254: Q6.3 36.58,62.99 36.92,62.65 C18.1 38.77,62.65 42.16,66.04 LED6.C
N$36
  Top 0.254: R18.1 38.7,60.54 39.12,60.96 39.12,61.72 41.15,63.75 46.74,63.75 47.27,64.28 LED6.A
N$37
  Top 0.254: U7.4 77.03,64.45 76.71,64.77 76.71,65.79 76.96,66.04 C20.2
N$38
  Top 0.254: C20.1 81.53,66.04 | 81.53,66.04 82.8,66.04 83.06,65.79 83.06,64.77 82.74,64.45 U7.3 | R19.1 81.53,66.04
N$39
  Top 0.254: U7.6 78.89,61.83 79.25,61.47 82.17,61.47 82.83,60.81 82.83,59.97 82.55,59.69 JP63.2
N$40
  Top 0.254: R20.2 61.21,65.53 61.53,65.85 Q7.1
N$41
  Top 0.254: Q7.3 62.48,62.99 62.83,62.65 C21.1 64.68,62.65 68.07,66.04 LED7.C
N$42
  Top 0.254: R21.1 64.6,60.54 65.02,60.96 65.02,61.72 67.06,63.75 72.64,63.75 73.17,64.28 LED7.A
N$43
  Top 0.254: U8.4 102.94,64.45 102.62,64.77 102.62,65.79 102.87,66.04 C23.2
N$44
  Top 0.254: C23.1 107.44,66.04 | 107.44,66.04 108.71,66.04 108.97,65.79 108.97,64.77 108.65,64.45 U8.3 | R22.1 107.44,66.04
N$45
  Top 0.254: U8.6 104.8,61.83 105.16,61.47 108.08,61.47 108.74,60.81 108.74,59.97 108.46,59.69 JP72.2
N$46
  Top 0.254: R23.2 87.12,65.53 87.44,65.85 Q8.1
N$47
  Top 0.254: Q8.3 88.39,62.99 88.73,62.65 C24.1 90.59,62.65 93.98,66.04 LED8.C
N$48
  Top 0.254: R24.1 90.51,60.54 90.93,60.96 90.93,61.72 92.96,63.75 98.55,63.75 99.08,64.28 LED8.A
N$49
  Top 0.254: U9.4 25.21,103.82 24.89,104.14 24.89,105.16 25.15,105.41 C26.2
N$50
  Top 0.254: C26.1 29.72,105.41 | 29.72,105.41 30.99,105.41 31.24,105.16 31.24,104.14 30.92,103.82 U9.3 | R25.1 29.72,105.41
N$51
  Top 0.254: U9.6 27.07,101.2 27.43,100.84 30.35,100.84 31.01,100.18 31.01,99.34 30.73,99.06 JP81.2
N$52
  Top 0.254: R26.2 9.4,104.9 9.72,105.22 Q9.1
N$53
  Top 0.254: Q9.3 10.67,102.36 11.01,102.02 C27.1 12.87,102.02 16.26,105.41 LED9.C
N$54
  Top 0.254: R27.1 12.79,99.91 13.21,100.33 13.21,101.09 15.24,103.12 20.83,103.12 21.36,103.65 LED9.A
N$55
  Top 0.254: U10.4 51.12,103.82 50.8,104.14 50.8,105.16 51.05,105.41 C29.2
N$56
  Top 0.254: C29.1 55.63,105.41 | 55.63,105.41 56.9,105.41 57.15,105.16 57.15,104.14 56.83,103.82 U10.3 | R28.1 55.63,105.41
N$57
  Top 0.254: U10.6 52.98,101.2 53.34,100.84 56.26,100.84 56.92,100.18 56.92,99.34 56.64,99.06 JP90.2
N$58
  Top 0.254: R29.2 35.31,104.9 35.63,105.22 Q10.1
N$59
  Top 0.254: Q10.3 36.58,102.36 36.92,102.02 C30.1 38.77,102.02 42.16,105.41 LED10.C
N$60
  Top 0.254: R30.1 38.7,99.91 39.12,100.33 39.12,101.09 41.15,103.12 46.74,103.12 47.27,103.65 LED10.A
N$61
  Top 0.254: U11.4 77.03,103.82 76.71,104.14 76.71,105.16 76.96,105.41 C32.2
N$62
  Top 0.254: C32.1 81.53,105.41 | 81.53,105.41 82.8,105.41 83.06,105.16 83.06,104.14 82.74,103.82 U11.3 | R31.1 81.53,105.41
N$63
  Top 0.254: U11.6 78.89,101.2 79.25,100.84 82.17,100.84 82.83,100.18 82.83,99.34 82.55,99.06 JP99.2
N$64
  Top 0.254: R32.2 61.21,104.9 61.53,105.22 Q11.1
N$65
  Top 0.254: Q11.3 62.48,102.36 62.83,102.02 C33.1 64.68,102.02 68.07,105.41 LED11.C
N$66
  Top 0.254: R33.1 64.6,99.91 65.02,100.33 65.02,101.09 67.06,103.12 72.64,103.12 73.17,103.65 LED11.A
N$67
  Top 0.254: U12.4 102.94,103.82 102.62,104.14 102.62,105.16 102.87,105.41 C35.2
N$68
  Top 0.254: C35.1 107.44,105.41 | 107.44,105.41 108.71,105.41 108.97,105.16 108.97,104.14 108.65,103.82 U12.3 | R34.1 107.44,105.41
N$69
  Top 0.254: U12.6 104.8,101.2 105.16,100.84 108.08,100.84 108.74,100.18 108.74,99.34 108.46,99.06 JP108.2
N$70
  Top 0.254: R35.2 87.12,104.9 87.44,105.22 Q12.1
N$71
  Top 0.254: Q12.3 88.39,102.36 88.73,102.02 C36.1 90.59,102.02 93.98,105.41 LED12.C
N$72
  Top 0.254: R36.1 90.51,99.91 90.93,100.33 90.93,101.09 92.96,103.12 98.55,103.12 99.08,103.65 LED12.A
OUT  (via drill 0.51)
  Top 0.254: JP7.1 9.4,19.05 9.91,18.54 v13.72,18.54 | U1.1 30.67,23.18 v31.24,22.61 | JP3.1 JP6.3
  Bottom 0.254: v31.24,22.61 27.18,18.54 20.83,18.54 | JP3.1 20.83,18.54 | v13.72,18.54 20.83,18.54
OUT1  (via drill 0.51)
  Top 0.254: JP10.1 35.31,19.05 35.81,18.54 v39.62,18.54 | U2.1 56.58,23.18 v57.15,22.61 | JP13.1 JP16.3
  Bottom 0.254: v57.15,22.61 53.09,18.54 46.74,18.54 | JP13.1 46.74,18.54 | v39.62,18.54 46.74,18.54
OUT2  (via drill 0.51)
  Top 0.254: JP19.1 61.21,19.05 61.72,18.54 v65.53,18.54 | U3.1 82.48,23.18 v83.06,22.61 | JP22.1 JP25.3
  Bottom 0.254: v83.06,22.61 78.99,18.54 72.64,18.54 | JP22.1 72.64,18.54 | v65.53,18.54 72.64,18.54
OUT3  (via drill 0.51)
  Top 0.254: JP28.1 87.12,19.05 87.63,18.54 v91.44,18.54 | U4.1 108.39,23.18 v108.97,22.61 | JP31.1 JP34.3
  Bottom 0.254: v108.97,22.61 104.9,18.54 98.55,18.54 | JP31.1 98.55,18.54 | v91.44,18.54 98.55,18.54
OUT4  (via drill 0.51)
  Top 0.254: JP37.1 9.4,58.42 9.91,57.91 v13.72,57.91 | U5.1 30.67,62.55 v31.24,61.98 | JP40.1 JP43.3
  Bottom 0.254: v31.24,61.98 27.18,57.91 20.83,57.91 | JP40.1 20.83,57.91 | v13.72,57.91 20.83,57.91
OUT5  (via drill 0.51)
  Top 0.254: JP46.1 35.31,58.42 35.81,57.91 v39.62,57.91 | U6.1 56.58,62.55 v57.15,61.98 | JP49.1 JP52.3
  Bottom 0.254: v57.15,61.98 53.09,57.91 46.74,57.91 | JP49.1 46.74,57.91 | v39.62,57.91 46.74,57.91
OUT6  (via drill 0.51)
  Top 0.254: JP55.1 61.21,58.42 61.72,57.91 v65.53,57.91 | U7.1 82.48,62.55 v83.06,61.98 | JP58.1 JP61.3
  Bottom 0.254: v83.06,61.98 78.99,57.91 72.64,57.91 | JP58.1 72.64,57.91 | v65.53,57.91 72.64,57.91
OUT7  (via drill 0.51)
  Top 0.254: JP64.1 87.12,58.42 87.63,57.91 v91.44,57.91 | U8.1 108.39,62.55 v108.97,61.98 | JP67.1 JP70.3
  Bottom 0.254: v108.97,61.98 104.9,57.91 98.55,57.91 | JP67.1 98.55,57.91 | v91.44,57.91 98.55,57.91
OUT8  (via drill 0.51)
  Top 0.254: JP73.1 9.4,97.79 9.91,97.28 v13.72,97.28 | U9.1 30.67,101.92 v31.24,101.35 | JP76.1 JP79.3
  Bottom 0.254: v31.24,101.35 27.18,97.28 20.83,97.28 | JP76.1 20.83,97.28 | v13.72,97.28 20.83,97.28
OUT9  (via drill 0.51)
  Top 0.254: JP82.1 35.31,97.79 35.81,97.28 v39.62,97.28 | U10.1 56.58,101.92 v57.15,101.35 | JP85.1 JP88.3
  Bottom 0.254: v57.15,101.35 53.09,97.28 46.74,97.28 | JP85.1 46.74,97.28 | v39.62,97.28 46.74,97.28
OUT10  (via drill 0.51)
  Top 0.254: JP91.1 61.21,97.79 61.72,97.28 v65.53,97.28 | U11.1 82.48,101.92 v83.06,101.35 | JP94.1 JP97.3
  Bottom 0.254: v83.06,101.35 78.99,97.28 72.64,97.28 | JP94.1 72.64,97.28 | v65.53,97.28 72.64,97.28
OUT11  (via drill 0.51)
  Top 0.254: JP100.1 87.12,97.79 87.63,97.28 v91.44,97.28 | U12.1 108.39,101.92 v108.97,101.35 | JP103.1 JP106.3
  Bottom 0.254: v108.97,101.35 104.9,97.28 98.55,97.28 | JP103.1 98.55,97.28 | v91.44,97.28 98.55,97.28
PAD
  Top 0.254: JP5.1 JP9.P$1 R1.2
  Bottom 0.254: 19.56,35.56 23.37,31.75 25.91,31.75 25.91,30.23 25.65,29.97 25.4,29.97 | 15.75,35.56 15.75,31.75 | 19.63,35.56 19.51,35.69 | 19.81,35.56 JP5.1
  Bottom 6.35: 19.56,35.56 19.63,35.56 19.81,35.56 23.37,35.56 | 15.75,31.75 arc-270 23.37,31.75 15.75,31.75
PAD1
  Top 0.254: JP15.1 JP17.P$1 R4.2
  Bottom 0.254: 45.47,35.56 49.28,31.75 51.82,31.75 51.82,30.23 51.56,29.97 51.31,29.97 | 41.66,35.56 41.66,31.75 | 45.54,35.56 45.41,35.69 | 45.72,35.56 JP15.1
  Bottom 6.35: 45.47,35.56 45.54,35.56 45.72,35.56 49.28,35.56 | 41.66,31.75 arc-270 49.28,31.75 41.66,31.75
PAD2
  Top 0.254: JP24.1 JP26.P$1 R7.2
  Bottom 0.254: 71.37,35.56 75.18,31.75 77.72,31.75 77.72,30.23 77.47,29.97 77.22,29.97 | 67.56,35.56 67.56,31.75 | 71.45,35.56 71.32,35.69 | 71.63,35.56 JP24.1
  Bottom 6.35: 71.37,35.56 71.45,35.56 71.63,35.56 75.18,35.56 | 67.56,31.75 arc-270 75.18,31.75 67.56,31.75
PAD3
  Top 0.254: JP33.1 JP35.P$1 R10.2
  Bottom 0.254: 97.28,35.56 101.09,31.75 103.63,31.75 103.63,30.23 103.38,29.97 103.12,29.97 | 93.47,35.56 93.47,31.75 | 97.36,35.56 97.23,35.69 | 97.54,35.56 JP33.1
  Bottom 6.35: 97.28,35.56 97.36,35.56 97.54,35.56 101.09,35.56 | 93.47,31.75 arc-270 101.09,31.75 93.47,31.75
PAD4
  Top 0.254: JP42.1 JP44.P$1 R13.2
  Bottom 0.254: 19.56,74.93 23.37,71.12 25.91,71.12 25.91,69.6 25.65,69.34 25.4,69.34 | 15.75,74.93 15.75,71.12 | 19.63,74.93 19.51,75.06 | 19.81,74.93 JP42.1
  Bottom 6.35: 19.56,74.93 19.63,74.93 19.81,74.93 23.37,74.93 | 15.75,71.12 arc-270 23.37,71.12 15.75,71.12
PAD5
  Top 0.254: JP51.1 JP53.P$1 R16.2
  Bottom 0.254: 45.47,74.93 49.28,71.12 51.82,71.12 51.82,69.6 51.56,69.34 51.31,69.34 | 41.66,74.93 41.66,71.12 | 45.54,74.93 45.41,75.06 | 45.72,74.93 JP51.1
  Bottom 6.35: 45.47,74.93 45.54,74.93 45.72,74.93 49.28,74.93 | 41.66,71.12 arc-270 49.28,71.12 41.66,71.12
PAD6
  Top 0.254: JP60.1 JP62.P$1 R19.2
  Bottom 0.254: 71.37,74.93 75.18,71.12 77.72,71.12 77.72,69.6 77.47,69.34 77.22,69.34 | 67.56,74.93 67.56,71.12 | 71.45,74.93 71.32,75.06 | 71.63,74.93 JP60.1
  Bottom 6.35: 71.37,74.93 71.45,74.93 71.63,74.93 75.18,74.93 | 67.56,71.12 arc-270 75.18,71.12 67.56,71.12
PAD7
  Top 0.254: JP69.1 JP71.P$1 R22.2
  Bottom 0.254: 97.28,74.93 101.09,71.12 103.63,71.12 103.63,69.6 103.38,69.34 103.12,69.34 | 93.47,74.93 93.47,71.12 | 97.36,74.93 97.23,75.06 | 97.54,74.93 JP69.1
  Bottom 6.35: 97.28,74.93 97.36,74.93 97.54,74.93 101.09,74.93 | 93.47,71.12 arc-270 101.09,71.12 93.47,71.12
PAD8
  Top 0.254: JP78.1 JP80.P$1 R25.2
  Bottom 0.254: 19.56,114.3 23.37,110.49 25.91,110.49 25.91,108.97 25.65,108.71 25.4,108.71 | 15.75,114.3 15.75,110.49 | 19.63,114.3 19.51,114.43 | 19.81,114.3 JP78.1
  Bottom 6.35: 19.56,114.3 19.63,114.3 19.81,114.3 23.37,114.3 | 15.75,110.49 arc-270 23.37,110.49 15.75,110.49
PAD9
  Top 0.254: JP87.1 JP89.P$1 R28.2
  Bottom 0.254: 45.47,114.3 49.28,110.49 51.82,110.49 51.82,108.97 51.56,108.71 51.31,108.71 | 41.66,114.3 41.66,110.49 | 45.54,114.3 45.41,114.43 | 45.72,114.3 JP87.1
  Bottom 6.35: 45.47,114.3 45.54,114.3 45.72,114.3 49.28,114.3 | 41.66,110.49 arc-270 49.28,110.49 41.66,110.49
PAD10
  Top 0.254: JP96.1 JP98.P$1 R31.2
  Bottom 0.254: 71.37,114.3 75.18,110.49 77.72,110.49 77.72,108.97 77.47,108.71 77.22,108.71 | 67.56,114.3 67.56,110.49 | 71.45,114.3 71.32,114.43 | 71.63,114.3 JP96.1
  Bottom 6.35: 71.37,114.3 71.45,114.3 71.63,114.3 75.18,114.3 | 67.56,110.49 arc-270 75.18,110.49 67.56,110.49
PAD11
  Top 0.254: JP105.1 JP107.P$1 R34.2
  Bottom 0.254: 97.28,114.3 101.09,110.49 103.63,110.49 103.63,108.97 103.38,108.71 103.12,108.71 | 93.47,114.3 93.47,110.49 | 97.36,114.3 97.23,114.43 | 97.54,114.3 JP105.1
  Bottom 6.35: 97.28,114.3 97.36,114.3 97.54,114.3 101.09,114.3 | 93.47,110.49 arc-270 101.09,110.49 93.47,110.49
VCC
  Top 0.254: JP8.1 29.68,21.17 C1.1 25.18,21.17 24.89,21.46 24.89,23.11 | R3.2 12.87,19.47 13.97,20.57 13.97,21.34 15.75,23.11 18.29,23.11 | U1.5 25.4,24.13 24.89,23.62 24.89,23.11 | 18.29,23.11 24.89,23.11 | JP6.2 18.29,23.11
  Top 0.508: JP2.1 JP6.2
VCC1
  Top 0.254: JP18.1 55.59,21.17 C4.1 51.09,21.17 50.8,21.46 50.8,23.11 | R6.2 38.77,19.47 39.88,20.57 39.88,21.34 41.66,23.11 44.2,23.11 | U2.5 51.31,24.13 50.8,23.62 50.8,23.11 | 44.2,23.11 50.8,23.11 | JP16.2 44.2,23.11
  Top 0.508: JP12.1 JP16.2
VCC2
  Top 0.254: JP27.1 81.5,21.17 C7.1 77,21.17 76.71,21.46 76.71,23.11 | R9.2 64.68,19.47 65.79,20.57 65.79,21.34 67.56,23.11 70.1,23.11 | U3.5 77.22,24.13 76.71,23.62 76.71,23.11 | 70.1,23.11 76.71,23.11 | JP25.2 70.1,23.11
  Top 0.508: JP21.1 JP25.2
VCC3
  Top 0.254: JP36.1 107.41,21.17 C10.1 102.91,21.17 102.62,21.46 102.62,23.11 | R12.2 90.59,19.47 91.69,20.57 91.69,21.34 93.47,23.11 96.01,23.11 | U4.5 103.12,24.13 102.62,23.62 102.62,23.11 | 96.01,23.11 102.62,23.11 | JP34.2 96.01,23.11
  Top 0.508: JP30.1 JP34.2
VCC4
  Top 0.254: JP45.1 29.68,60.54 C13.1 25.18,60.54 24.89,60.83 24.89,62.48 | R15.2 12.87,58.84 13.97,59.94 13.97,60.71 15.75,62.48 18.29,62.48 | U5.5 25.4,63.5 24.89,62.99 24.89,62.48 | 18.29,62.48 24.89,62.48 | JP43.2 18.29,62.48
  Top 0.508: JP39.1 JP43.2
VCC5
  Top 0.254: JP54.1 55.59,60.54 C16.1 51.09,60.54 50.8,60.83 50.8,62.48 | R18.2 38.77,58.84 39.88,59.94 39.88,60.71 41.66,62.48 44.2,62.48 | U6.5 51.31,63.5 50.8,62.99 50.8,62.48 | 44.2,62.48 50.8,62.48 | JP52.2 44.2,62.48
  Top 0.508: JP48.1 JP52.2
VCC6
  Top 0.254: JP63.1 81.5,60.54 C19.1 77,60.54 76.71,60.83 76.71,62.48 | R21.2 64.68,58.84 65.79,59.94 65.79,60.71 67.56,62.48 70.1,62.48 | U7.5 77.22,63.5 76.71,62.99 76.71,62.48 | 70.1,62.48 76.71,62.48 | JP61.2 70.1,62.48
  Top 0.508: JP57.1 JP61.2
VCC7
  Top 0.254: JP72.1 107.41,60.54 C22.1 102.91,60.54 102.62,60.83 102.62,62.48 | R24.2 90.59,58.84 91.69,59.94 91.69,60.71 93.47,62.48 96.01,62.48 | U8.5 103.12,63.5 102.62,62.99 102.62,62.48 | 96.01,62.48 102.62,62.48 | JP70.2 96.01,62.48
  Top 0.508: JP66.1 JP70.2
VCC8
  Top 0.254: JP81.1 29.68,99.91 C25.1 25.18,99.91 24.89,100.2 24.89,101.85 | R27.2 12.87,98.21 13.97,99.31 13.97,100.08 15.75,101.85 18.29,101.85 | U9.5 25.4,102.87 24.89,102.36 24.89,101.85 | 18.29,101.85 24.89,101.85 | JP79.2 18.29,101.85
  Top 0.508: JP75.1 JP79.2
VCC9
  Top 0.254: JP90.1 55.59,99.91 C28.1 51.09,99.91 50.8,100.2 50.8,101.85 | R30.2 38.77,98.21 39.88,99.31 39.88,100.08 41.66,101.85 44.2,101.85 | U10.5 51.31,102.87 50.8,102.36 50.8,101.85 | 44.2,101.85 50.8,101.85 | JP88.2 44.2,101.85
  Top 0.508: JP84.1 JP88.2
VCC10
  Top 0.254: JP99.1 81.5,99.91 C31.1 77,99.91 76.71,100.2 76.71,101.85 | R33.2 64.68,98.21 65.79,99.31 65.79,100.08 67.56,101.85 70.1,101.85 | U11.5 77.22,102.87 76.71,102.36 76.71,101.85 | 70.1,101.85 76.71,101.85 | JP97.2 70.1,101.85
  Top 0.508: JP93.1 JP97.2
VCC11
  Top 0.254: JP108.1 107.41,99.91 C34.1 102.91,99.91 102.62,100.2 102.62,101.85 | R36.2 90.59,98.21 91.69,99.31 91.69,100.08 93.47,101.85 96.01,101.85 | U12.5 103.12,102.87 102.62,102.36 102.62,101.85 | 96.01,101.85 102.62,101.85 | JP106.2 96.01,101.85
  Top 0.508: JP102.1 JP106.2